# EAGLE board mySensors (EAGLE 7.6.0)
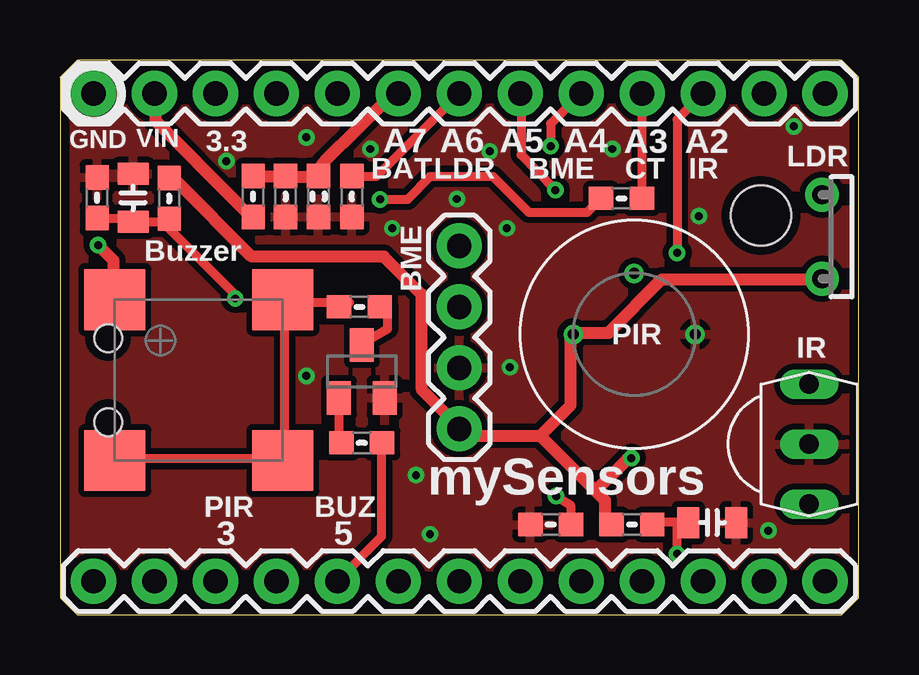
[diagram p0: board, top side]
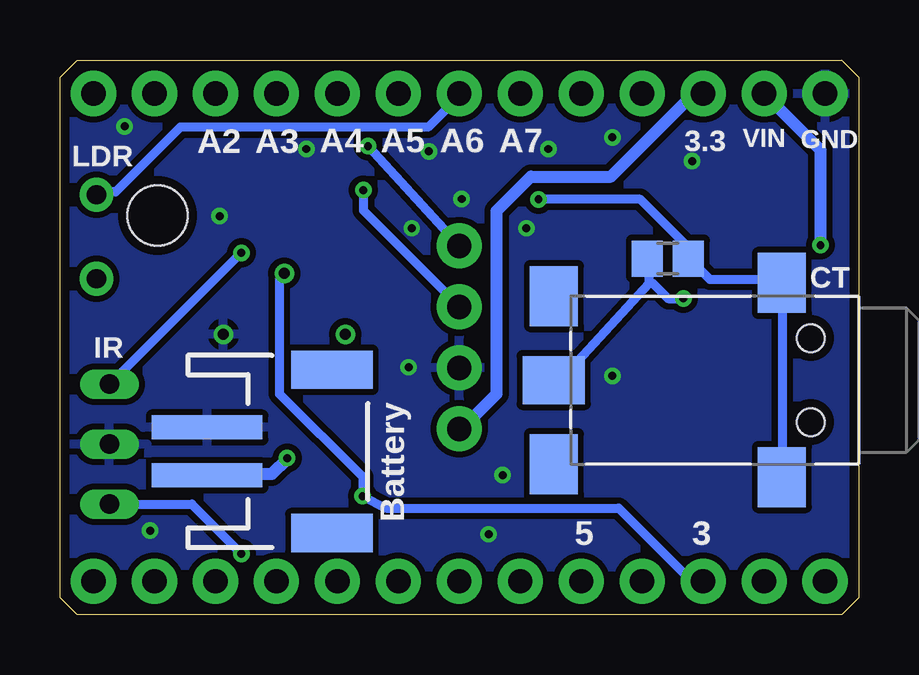
[diagram p1: board, bottom side, seen from below]

Size 33.27 x 23.11 mm. Coordinates in mm from the lower left corner, seen from the top.
Outline: 0.71,0 32.56,0 33.27,0.71 33.27,22.4 32.56,23.11 0.71,23.11 0,22.4 0,0.71 0.71,0
Copper layers (1*16): Top 0.0356mm / dielectric 1.5011mm / Bottom 0.0356mm
Design rules "oshpark-2layer": minimum track width 6mil, minimum drill 13mil, track to track 6mil, track to pad 6mil, pad to pad 6mil, via to via 6mil, smd to smd 6mil, copper to edge 15mil, drill to drill 6mil, minimum pad ring 7mil, minimum via ring 7mil, stop-mask expansion 2.5mil, vias tented up to drill 0mil, thermal gap 10mil
Net classes: 0 default: width 0.381 mm, clearance 0.254 mm; 1 power: width 0.508 mm, clearance 0.254 mm
Holes 2.5 mm at 29.21,16.64

## Footprints (pad centres in the part's own frame; a part is rotated, then mirrored left to right if it is on the bottom)
1X13 = drill 1.016 pad 1.88: 1 0,0; 2 2.54,0; 3 5.08,0; 4 7.62,0; 5 10.16,0; 6 12.7,0; 7 15.24,0; 8 17.78,0; 9 20.32,0; 10 22.86,0; 11 25.4,0; 12 27.94,0; 13 30.48,0
SOT23-BEC = smd 1 x 1.4: B -0.95,-1.1; C 0,1.1; E 0.95,-1.1
R0805 = smd 1.3 x 1.5: 1 -0.85,0; 2 0.85,0
0805-CAP = smd 0.902 x 1.3: 1 -1,0; 2 1,0
0603-CAP = smd 1.016 x 0.965: 1 -0.85,0; 2 0.85,0
1503-03 = smd 2.6 x 2: 1 12.7,0 | smd 2 x 2.5: 2 12.7,-3.5; 3 12.7,3.5; 4 3.2,4.05; 4-2 3.2,-4.05 | hole 1.15: 2,-1.75; 2,1.75
TSOP18XX = drill 0.813 long: GND -0.001,-0.027; OUT -2.501,-0.027; VCC 2.499,-0.027
JST-2-SMD = smd 1 x 4.6: 1 -1,-3.7; 2 1,-3.7 | smd 1.6 x 3.4: NC1 -3.4,1.5; NC2 3.4,1.5
CONNECTORS_1X4 = drill 1.016 pad 1.88: 1 0,0; 2 2.54,0; 3 5.08,0; 4 7.62,0
M9960 = drill 0.8 pad 1.4: 1 -1.75,0; 2 1.75,0
BUZZER-PIEZO_SMD = smd 2.54 x 2.54: + 0,6.7; - 7,6.7; DUMMY 0,0; DUMMY1 7,0
0603-RES = smd 1.016 x 0.965: 1 -0.85,0; 2 0.85,0
PIR-PANASONIC-VZ-WL-STANDARD = drill 0.457: GND 0,-2.54; OUT 2.54,0; VDD 0,2.54

## Placement (x,y rotation side)
ANALOGSIDE  M13  [1X13]  31.88,21.72 180 top
BC817-40  [SOT23-BEC]  12.57,10.13 0 top
BURDEN  R150 0.1%  [R0805]  7.95,14.83 180 bottom
C2  10u  [0805-CAP]  3.05,17.37 90 top
C3  4,7u  [0805-CAP]  27.18,3.84 0 top
C105  0,1u  [0603-CAP]  10.77,17.42 270 top
CT1  1503_13  [1503-03]  0,9.78 180 bottom
DIGITALSIDE  M13  [1X13]  31.88,1.4 180 top
IR-RX  TSOP4836  [TSOP18XX]  31.24,7.11 270 top
J1  [JST-2-SMD]  23.44,6.81 270 bottom
JP1  CONNECTORS_M4""  [CONNECTORS_1X4]  16.64,7.75 90 top
LDR  GL5537  [M9960]  31.75,15.75 90 top
PIEZO  BUZZER-PIEZO_SMD  [BUZZER-PIEZO_SMD]  2.29,6.43 0 top
R1  100k  [0603-RES]  20.45,3.76 180 top
R2  470k  [0603-RES]  4.55,17.35 270 top
R3  100  [0603-RES]  23.83,3.76 180 top
R4  33  [0603-RES]  12.47,12.83 0 top
R5  470k  [0603-RES]  1.55,17.37 90 top
R6  1k  [0603-RES]  23.39,17.35 0 top
R7  1M  [0603-RES]  8.05,17.42 90 top
R8  301k  [0603-RES]  12.17,17.42 90 top
R103  1k  [0603-RES]  12.57,7.16 180 top
R104  470k  [0603-RES]  9.4,17.42 270 top
U$1  EKMB1X011X  [PIR-PANASONIC-VZ-WL-STANDARD]  23.93,11.68 90 top

## Library data of the parts
ANALOGSIDE DIGITALSIDE = SparkFun-Connectors; BUERKLIN: 59 F 2140
BC817-40 = myLib; BUERKLIN: 12S6220
BURDEN = resistor; BUERKLIN: 28 E 114
C2 = LowPowerLab; BUERKLIN: 53 D 2432
C3 = LowPowerLab; BUERKLIN: 53 D 2431
C105 = LowPowerLab; BUERKLIN: 53 D 1726
CT1 = myLib; BUERKLIN: 39F1215
IR-RX = myLib; CONRAD: 171107-62; EBAY: TSOP34836
J1 = myLib; BUERKLIN: 71 F 5386; CONRAD: 1217299 - 62; PROD_ID: S2B-PH-SM4-TB
JP1 = myLib
LDR = photo-elements; EBAY: GL5537
PIEZO = myLib; BUERKLIN: 36 M 370; BUERKLIN_3V: 36 M 346
R1 = LowPowerLab; BUERKLIN: 26 E 840
R2 R5 R104 = LowPowerLab; BUERKLIN: 26 E 856
R3 = LowPowerLab; BUERKLIN: 26 E 768
R4 = LowPowerLab; BUERKLIN: 26 E 756
R6 R103 = LowPowerLab; BUERKLIN: 26 E 792
R7 = LowPowerLab; BUERKLIN: 26 E 864
R8 = LowPowerLab; BUERKLIN: 26 E 7197
U$1 = myLib; DIGIKEY: 255-3065-ND

## Nets
+3V3 [power]: ANALOGSIDE.11 J1.2 JP1.1 LDR.1 R2.1 R3.2 U$1.VDD
A0_RFM-1_RST: ANALOGSIDE.1
A1_RFM-2_RST: ANALOGSIDE.2
A2_IR-RX: ANALOGSIDE.3 IR-RX.OUT
A3_RFM-3_RST: ANALOGSIDE.4 R6.2
A4_SDA_BME: ANALOGSIDE.5 JP1.4
A5_SCL_BME: ANALOGSIDE.6 JP1.3
A6_LDR: ANALOGSIDE.7 LDR.2 R8.2
A7_BAT-SENS [power]: ANALOGSIDE.8 C105.1 R7.2 R104.1
D0_RX: ANALOGSIDE.9
D1_TX: ANALOGSIDE.10
D2_RFM-1_IRQ: DIGITALSIDE.12
D3_RFM-2_IRQ: DIGITALSIDE.11 R1.1 U$1.OUT
D4_RFM-2_SS: DIGITALSIDE.10
D5_BUZZER: DIGITALSIDE.9 R103.1
D6_IR-TX: DIGITALSIDE.8
D7_RFM-3_SS: DIGITALSIDE.7
D8_RFM-3_IRQ: DIGITALSIDE.6
D9_LED: DIGITALSIDE.5
D10_RFM-1_SS: DIGITALSIDE.4
D11_MOSI: DIGITALSIDE.3
D12_MISO: DIGITALSIDE.2
D13_SCK: DIGITALSIDE.1
GND [power]: ANALOGSIDE.13 BC817-40.E C2.2 C3.2 C105.2 IR-RX.GND J1.1 JP1.2 R1.2 R5.2 R8.1 R104.2 U$1.GND
N$1: BURDEN.2 C2.1 CT1.1 R2.2 R5.1
N$3: BURDEN.1 CT1.4 CT1.4-2 R6.1
N$5: PIEZO.- PIEZO.DUMMY PIEZO.DUMMY1 R4.1
N$8: BC817-40.C R4.2
N$15: BC817-40.B R103.2
N$16: C3.1 IR-RX.VCC R3.1
RST: DIGITALSIDE.13
VCC [power]: ANALOGSIDE.12 PIEZO.+ R7.1

## Tracks (layer width: path | path; a pad name or v marks a point on that pad's centre or on a via)
+3V3  (via drill 0.33)
  Top 0.508: 16.67,7.62 JP1.1 | R2.1 4.64,18.22 4.82,18.1 8,14.92 13.49,14.92 15.08,13.34 15.08,9.37 16.51,7.94 JP1.1 | 20,7.46 22.3,5.16 | 22.3,5.16 22.7,4.76 22.7,3.85 R3.2 23.18,3.65 | 20,7.46 16.83,7.46 JP1.1 | 20,7.46 21.27,8.73 21.27,11.59 U$1.VDD 21.59,11.75 22.86,11.75 25.08,13.97 31.75,13.97 LDR.1 | v23.81,6.53 23.65,6.51 22.35,5.2 22.3,5.2 22.3,5.16
  Bottom 0.508: ANALOGSIDE.11 6.51,21.59 6.99,21.59 10.32,18.26 13.65,18.26 15.08,16.83 15.08,9.21 16.51,7.78 JP1.1 | 26.99,5.71 J1.2 26.83,5.87 24.45,5.87 23.81,6.51 v23.81,6.53
A2_IR-RX  (via drill 0.33)
  Top 0.381: v25.72,15.08 25.72,20.64 ANALOGSIDE.3
  Bottom 0.381: v25.72,15.08 31.11,9.68 IR-RX.OUT
A3_RFM-3_RST
  Top 0.381: R6.2 24.26,17.32 ANALOGSIDE.4
A4_SDA_BME  (via drill 0.33)
  Top 0.381: v20.44,19.53 20.44,20.47 ANALOGSIDE.5
  Bottom 0.381: v20.44,19.53 JP1.4
A5_SCL_BME  (via drill 0.33)
  Top 0.381: v20.64,17.69 20.61,17.73 19.21,19.16 19.21,21.59 ANALOGSIDE.6
  Bottom 0.381: v20.64,17.69 20.64,16.85 16.67,12.88 16.67,12.86 JP1.3
A6_LDR
  Top 0.381: ANALOGSIDE.7 13.18,18.26 12.22,18.26 R8.2
  Bottom 0.381: LDR.2 31.75,17.62 30.96,17.62 28.26,20.32 17.94,20.32 16.67,21.59 ANALOGSIDE.7
A7_BAT-SENS
  Top 0.508: R7.2 8.26,18.26 9.37,18.26 R104.1 9.68,18.26 10.64,18.26 C105.1 10.79,18.41 10.76,18.55 11.01,18.87 13.89,21.7 ANALOGSIDE.8
D3_RFM-2_IRQ  (via drill 0.33)
  Top 0.381: v20.67,4.94 21.27,4.57 21.27,3.85 R1.1
  Bottom 0.381: U$1.OUT 23.97,14.13 24.13,13.97 24.13,9.21 20.67,5.75 v20.67,4.94 v20.66,4.94 19.68,4.45 10,4.45 6.99,1.43 6.51,1.43 DIGITALSIDE.11
D5_BUZZER
  Top 0.381: DIGITALSIDE.9 13.4,3.27 13.4,6.76 R103.1
GND  (via drill 0.33)
  other vias: 10.26,9.96 13.84,16.1 10.26,19.89 6.93,18.9 30.58,20.35 15.42,3.35 18.62,16.1 16.54,17.32 17.91,19.3 23.01,19.41 12.93,19.41 29.51,3.51 18.75,10.31 14.83,5.82 26.62,16.61
  pour Bottom: -1.5,24.87 -1.4,-2.24 35.36,-1.93 34.9,24.71
  pour Top: -0.64,24 -0.64,-1.37 34.04,-1.37 34.04,24
N$1  (via drill 0.33)
  Top 0.381: v7.3,13.18 7.3,13.34 4.29,16.35 R2.2 4.45,16.37 C2.1 3.05,16.52 R5.1
  Bottom 0.381: 8.73,13.81 8.73,14.45 BURDEN.2 | 8.73,13.81 12.39,9.82 CT1.1 | v7.3,13.18 7.94,13.18 8.57,13.81 8.73,13.81
N$3  (via drill 0.33)
  Top 0.381: 22.54,17.3 R6.1 | v13.34,17.3 14.48,17.3 15.42,18.26 18.03,18.26 19.53,16.76 21.96,16.76 R6.1 | 22.52,17.35 R6.1
  Bottom 0.381: CT1.4 3.17,5.87 3.17,13.81 CT1.4-2 3.33,13.97 6.19,13.97 6.83,14.61 BURDEN.1 7.14,14.61 6.86,15.08 9.09,17.3 v13.34,17.3
N$5
  Top 0.381: R4.1 12.06,13.02 9.37,13.02 PIEZO.- 9.37,12.86 9.37,6.51 PIEZO.DUMMY1 9.21,6.51 2.38,6.51 PIEZO.DUMMY
N$8
  Top 0.381: R4.2 13.65,12.86 13.65,11.91 12.72,11.38 BC817-40.C
N$15
  Top 0.381: R103.2 11.61,7.33 11.61,9.07 BC817-40.B
N$16  (via drill 0.33)
  Top 0.381: 25.72,3.85 25.88,3.85 C3.1 26.04,4.01 | 25.72,3.85 24.77,3.85 R3.1 | v25.72,2.54 25.72,3.85
  Bottom 0.381: v25.72,2.54 27.78,4.6 31.11,4.6 IR-RX.VCC
VCC  (via drill 0.33)
  Top 0.508: R7.1 8.1,16.67 7.98,16.56 7.44,17.09 3.97,20.59 3.97,21.59 ANALOGSIDE.12 | v1.59,15.4 2.22,14.76 2.22,13.18 PIEZO.+
  Bottom 0.508: v1.59,15.4 1.59,19.37 ANALOGSIDE.12

## Text on the board
tPlace: mySensors
_tsilk: VIN | 3.3 | A7 | A6 | A5 | A4 | A3 | A2 | LDR | GND | BAT | LDR | BME | CT | IR | Buzzer | BME | PIR | IR | PIR | 3 | BUZ | 5
_bsilk: VIN | 3.3 | A7 | A6 | A5 | A4 | A3 | A2 | LDR | GND | CT | IR | 3 | 5 | Battery